# Altium PCB Routed BOARD 2.pcbdoc (part 1 of 2)
Units mil, origin at the board's own origin, x right, y up, seen from the top; angles counter-clockwise.
Board outline 6425 x 5035 mil, 2 copper layers (TopLayer, BottomLayer); 106 components, 189 nets, 1082 pads, 226 vias.
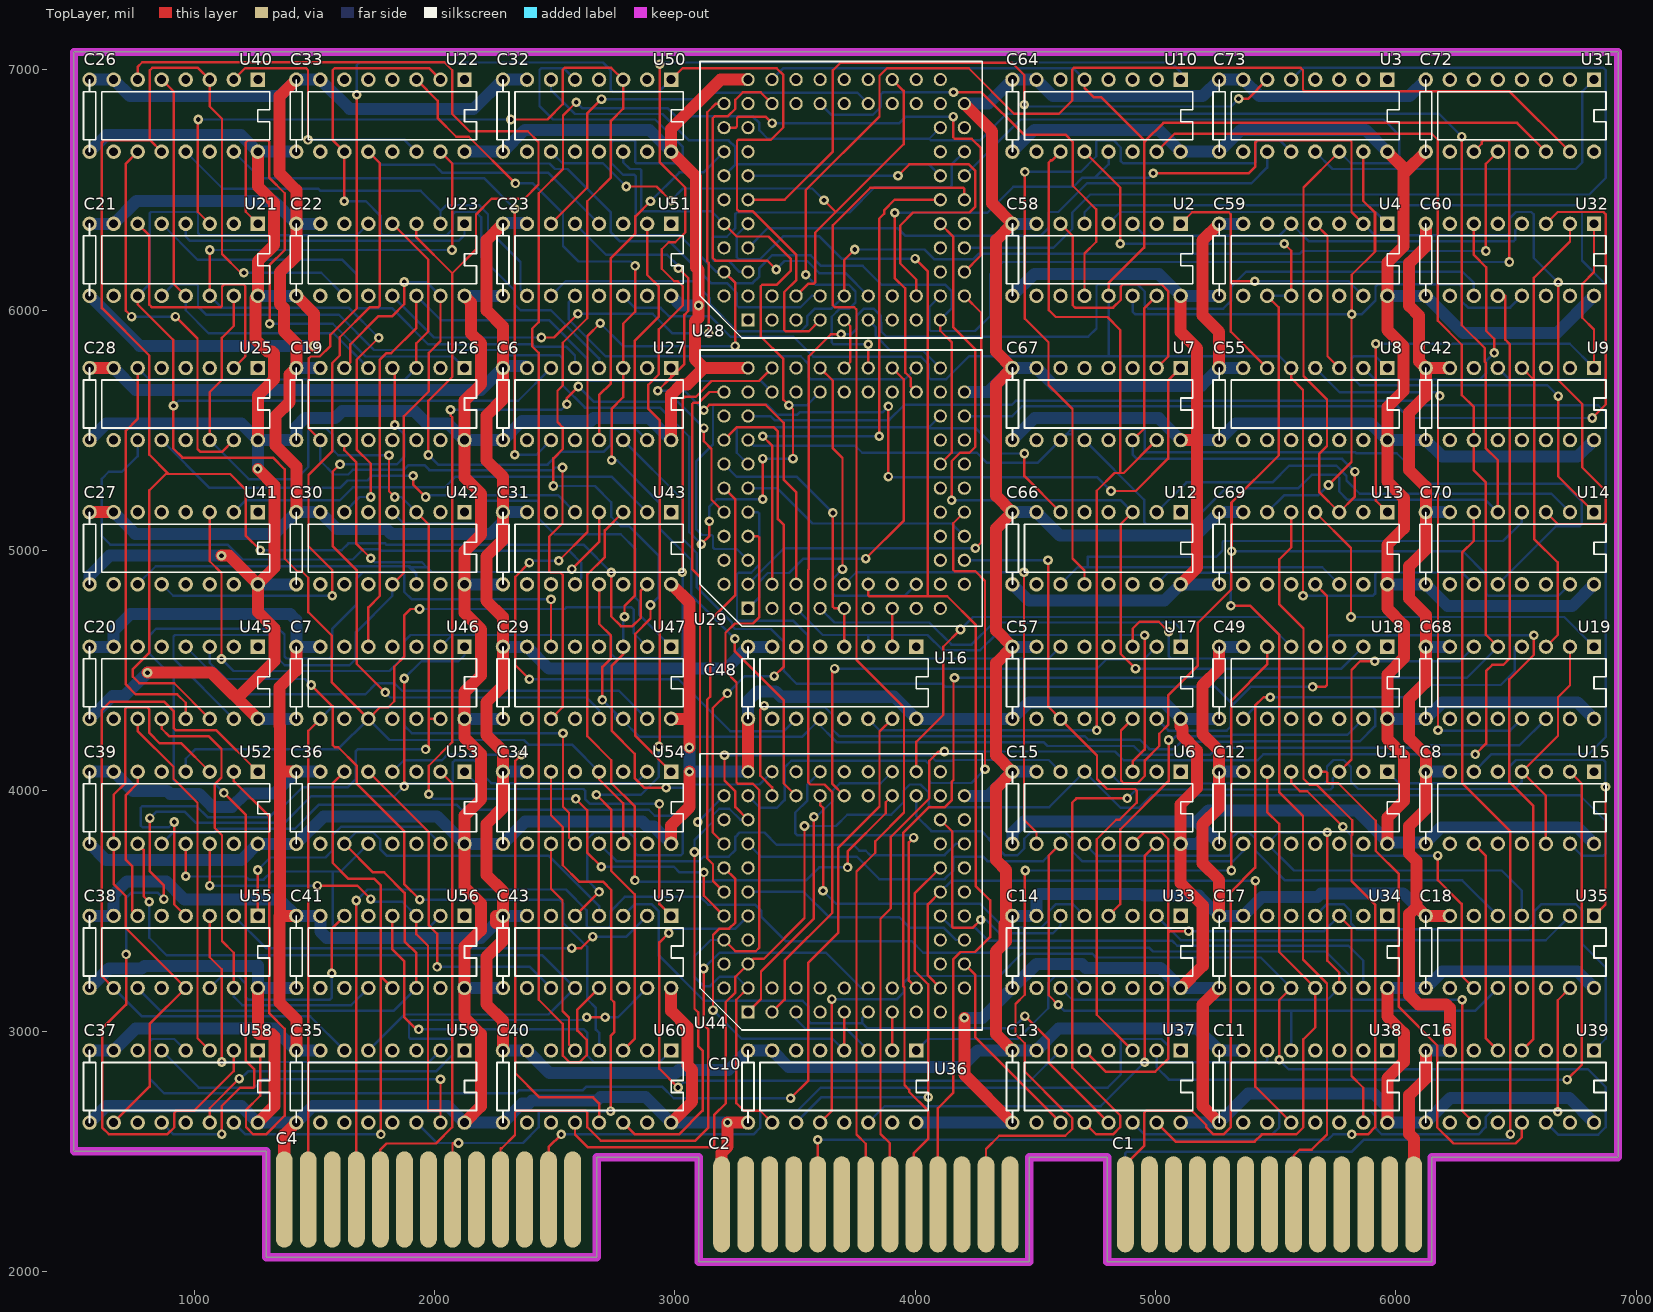
[diagram p0: TopLayer view]
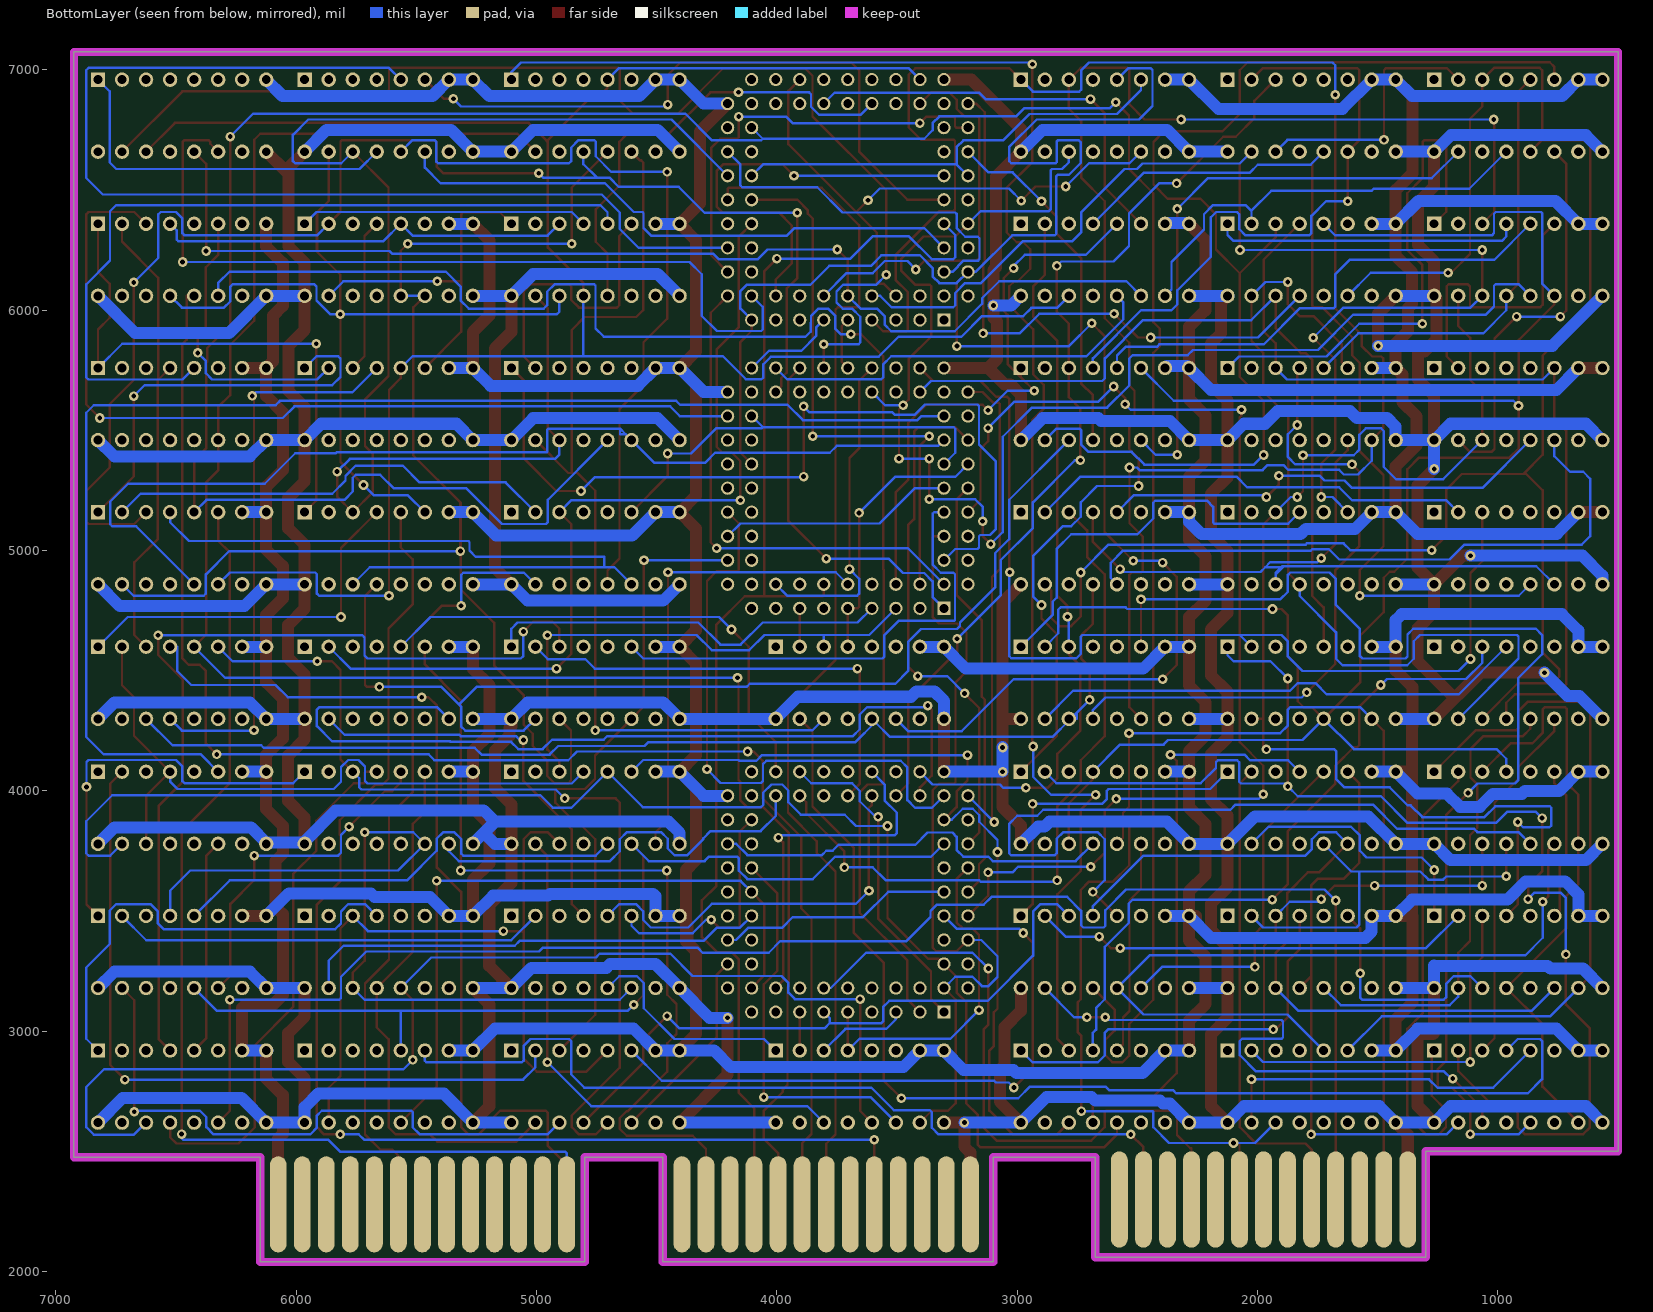
[diagram p1: BottomLayer view, seen from below]

## Layer stack, top to bottom
TopLayer: signal copper 1.4
Dielectric: core 12.6, FR-4, Dk 4.8
BottomLayer: signal copper 1.4

## Board outline
500,2500 500,7075 6925,7075 6925,2475 6150,2475 6150,2040 4800,2040 4800,2475 4475,2475 4475,2040 3100,2040 3100,2475 2675,2475 2675,2060 1300,2060 1300,2500 500,2500

## Design rules (kind name [scope] priority, off if disabled: settings)
Clearance [All] p1: gap=13
FabricationTestPointUsage TestPointUsage [All] p1: valid=0 allowmultiple=FALSE
FabricationTestpoint Testpoint [All] p1: side=3 testpointundercomponent=TRUE minsize=40 maxsize=100 preferedsize=60 minholesize=20 maxholesize=40 preferedholesize=32 testpointgrid=1 allowsidetop=TRUE allowsidebottom=TRUE usegrid=TRUE gridtolerance=0.01
FanoutControl Fanout_BGA [IsBGA] p1: bgadir=Out bgaviamode=Closest fanoutstyle=Auto fanoutdirection=Alternating viagrid=1 // Fanout_BGA (Default Rule)
FanoutControl Fanout_LCC [IsLCC] p2: bgadir=Out bgaviamode=Closest fanoutstyle=Auto fanoutdirection=Alternating viagrid=1 // Fanout_LCC (Default Rule)
FanoutControl Fanout_SOIC [IsSOIC] p3: bgadir=Out bgaviamode=Closest fanoutstyle=Auto fanoutdirection=Alternating viagrid=1 // Fanout_SOIC (Default Rule)
FanoutControl Fanout_Small [(CompPinCount < 5)] p4: bgadir=Out bgaviamode=Closest fanoutstyle=Auto fanoutdirection=OutThenIn viagrid=1 // Fanout_Small (Default Rule)
FanoutControl Fanout_Default [All] p5: bgadir=Out bgaviamode=Closest fanoutstyle=Auto fanoutdirection=Alternating viagrid=1 // Fanout_Default (Default Rule)
PlaneClearance [All] p1: clearance=10
PolygonConnect [All] p1: connectstyle=Relief reliefconductorwidth=10 reliefentries=4 polygonreliefangle="90 Angle"
RoutingPriority RoutingPriority_Power [InNetClass('Power')] p1: routingpriority=50
RoutingPriority [All] p2: routingpriority=0
RoutingVias [All] p1: holewidth=20 width=40 viastyle="Through Hole" minholewidth=20 minwidth=40 maxholewidth=20 maxwidth=40
SilkscreenOverComponentPads [All] p1: minsilkscreentomaskgap=10
SolderMaskExpansion [All] p1: expansion=2
Width Width_Power [InNetClass('Power')] p1: maxlimit=50 minlimit=50 preferedwidth=50
Width Width_All [All] p2: maxlimit=10 minlimit=10 preferedwidth=10
18 further rules are at their usual default settings.

## Classes and differential pairs
net class Power: GND VCC

## Components (designator, comment, footprint, x,y, rotation, side; value= is the part's Value field where it differs from the comment)
C1 "CON\26P\ED" CON\26P\ED 4875,2280 r180 top
C2 "CON\26P\ED" CON\26P\ED 3195,2280 r180 top
C4 "CON\26P\ED" CON\26P\ED 1375,2300 r180 top
C6 "CAP1" CAP1 2285,5460 r0 top
C7 "CAP1" CAP1 1425,4300 r0 top
C8 "CAP1" CAP1 6125,3780 r0 top
C10 "CAP1" CAP1 3305,2620 r0 top
C11 "CAP1" CAP1 5265,2620 r0 top
C12 "CAP1" CAP1 5265,3780 r0 top
C13 "CAP1" CAP1 4405,2620 r0 top
C14 "CAP1" CAP1 4405,3180 r0 top
C15 "CAP1" CAP1 4405,3780 r0 top
C16 "CAP1" CAP1 6125,2620 r0 top
C17 "CAP1" CAP1 5265,3180 r0 top
C18 "CAP1" CAP1 6125,3180 r0 top
C19 "CAP1" CAP1 1425,5460 r0 top
C20 "CAP1" CAP1 565,4300 r0 top
C21 "CAP1" CAP1 565,6060 r0 top
C22 "CAP1" CAP1 1425,6060 r0 top
C23 "CAP1" CAP1 2285,6060 r0 top
C26 "CAP1" CAP1 565,6660 r0 top
C27 "CAP1" CAP1 565,4860 r0 top
C28 "CAP1" CAP1 565,5460 r0 top
C29 "CAP1" CAP1 2285,4300 r0 top
C30 "CAP1" CAP1 1425,4860 r0 top
C31 "CAP1" CAP1 2285,4860 r0 top
C32 "CAP1" CAP1 2285,6660 r0 top
C33 "CAP1" CAP1 1425,6660 r0 top
C34 "CAP1" CAP1 2285,3780 r0 top
C35 "CAP1" CAP1 1425,2620 r0 top
C36 "CAP1" CAP1 1425,3780 r0 top
C37 "CAP1" CAP1 565,2620 r0 top
C38 "CAP1" CAP1 565,3180 r0 top
C39 "CAP1" CAP1 565,3780 r0 top
C40 "CAP1" CAP1 2285,2620 r0 top
C41 "CAP1" CAP1 1425,3180 r0 top
C42 "CAP1" CAP1 6125,5460 r0 top
C43 "CAP1" CAP1 2285,3180 r0 top
C48 "CAP1" CAP1 3305,4300 r0 top
C49 "CAP1" CAP1 5265,4300 r0 top
C55 "CAP1" CAP1 5265,5460 r0 top
C57 "CAP1" CAP1 4405,4300 r0 top
C58 "CAP1" CAP1 4405,6060 r0 top
C59 "CAP1" CAP1 5265,6060 r0 top
C60 "CAP1" CAP1 6125,6060 r0 top
C64 "CAP1" CAP1 4405,6660 r0 top
C66 "CAP1" CAP1 4405,4860 r0 top
C67 "CAP1" CAP1 4405,5460 r0 top
C68 "CAP1" CAP1 6125,4300 r0 top
C69 "CAP1" CAP1 5265,4860 r0 top
C70 "CAP1" CAP1 6125,4860 r0 top
C72 "CAP1" CAP1 6125,6660 r0 top
C73 "CAP1" CAP1 5265,6660 r0 top
U2 "7404" DIP14 5105,6360 r0 top
U3 "7404" DIP14 5965,6960 r0 top
U4 "7404" DIP14 5965,6360 r0 top
U6 "7404" DIP14 5105,4080 r0 top
U7 "7404" DIP14 5105,5760 r0 top
U8 "7404" DIP14 5965,5760 r0 top
U9 "7404" DIP14 6825,5760 r0 top
U10 "7404" DIP14 5105,6960 r0 top
U11 "7404" DIP14 5965,4080 r0 top
U12 "7404" DIP14 5105,5160 r0 top
U13 "7404" DIP14 5965,5160 r0 top
U14 "7404" DIP14 6825,5160 r0 top
U15 "7404" DIP14 6825,4080 r0 top
U16 "7404" DIP14 4005,4600 r0 top
U17 "7404" DIP14 5105,4600 r0 top
U18 "7404" DIP14 5965,4600 r0 top
U19 "7404" DIP14 6825,4600 r0 top
U21 "7404" DIP14 1265,6360 r0 top
U22 "7404" DIP14 2125,6960 r0 top
U23 "7404" DIP14 2125,6360 r0 top
U25 "7404" DIP14 1265,5760 r0 top
U26 "7404" DIP14 2125,5760 r0 top
U27 "7404" DIP14 2985,5760 r0 top
U28 "8397" ? 3305,5960 r0 top
U29 "8397" ? 3305,4760 r0 top
U31 "7404" DIP14 6825,6960 r0 top
U32 "7404" DIP14 6825,6360 r0 top
U33 "7404" DIP14 5105,3480 r0 top
U34 "7404" DIP14 5965,3480 r0 top
U35 "7404" DIP14 6825,3480 r0 top
U36 "7404" DIP14 4005,2920 r0 top
U37 "7404" DIP14 5105,2920 r0 top
U38 "7404" DIP14 5965,2920 r0 top
U39 "7404" DIP14 6825,2920 r0 top
U40 "7404" DIP14 1265,6960 r0 top
U41 "7404" DIP14 1265,5160 r0 top
U42 "7404" DIP14 2125,5160 r0 top
U43 "7404" DIP14 2985,5160 r0 top
U44 "8397" ? 3305,3080 r0 top
U45 "7404" DIP14 1265,4600 r0 top
U46 "7404" DIP14 2125,4600 r0 top
U47 "7404" DIP14 2985,4600 r0 top
U50 "7404" DIP14 2985,6960 r0 top
U51 "7404" DIP14 2985,6360 r0 top
U52 "7404" DIP14 1265,4080 r0 top
U53 "7404" DIP14 2125,4080 r0 top
U54 "7404" DIP14 2985,4080 r0 top
U55 "7404" DIP14 1265,3480 r0 top
U56 "7404" DIP14 2125,3480 r0 top
U57 "7404" DIP14 2985,3480 r0 top
U58 "7404" DIP14 1265,2920 r0 top
U59 "7404" DIP14 2125,2920 r0 top
U60 "7404" DIP14 2985,2920 r0 top

## Footprints (in the part's own frame and the unit in brackets; to place one, negate y for a bottom-side part, rotate by r counter-clockwise, add the part's x,y. Pads: shape width x height; smd on the part's side, far side on the other; paste and mask are expansions set on the pad)
CAP1 [mil]
  round 60 hole 37: 1(0,0) 2(0,300)
  silkscreen extent -25,0 25,300
CON\26P\ED [mil]
  oval 70x400 smd: 1(0,0) 3(-100,0) 5(-200,0) 7(-300,0) 9(-400,0) 11(-500,0) 13(-600,0) 15(-700,0) 17(-800,0) 19(-900,0) 21(-1000,0) 23(-1100,0) 25(-1200,0)
  oval 70x400 smd far side: 2(0,0) 4(-100,0) 6(-200,0) 8(-300,0) 10(-400,0) 12(-500,0) 14(-600,0) 16(-700,0) 18(-800,0) 20(-900,0) 22(-1000,0) 24(-1100,0) 26(-1200,0)
DIP14 [mil]
  rect 60x60 hole 37: 1(0,0)
  round 60 hole 37: 2(-100,0) 3(-200,0) 4(-300,0) 5(-400,0) 6(-500,0) 7(-600,0) 8(-600,-300) 9(-500,-300) 10(-400,-300) 11(-300,-300) 12(-200,-300) 13(-100,-300) 14(0,-300)
  silkscreen extent -650,-250 50,-50
? [mil]
  rect 55x55 hole 37: 1(0,0)
  round 55 hole 37: 2(0,100) 3(100,0) 4(100,100) 5(200,0) 6(200,100) 7(300,0) 8(300,100) 9(400,0) 10(400,100) 11(500,0) 12(500,100) 13(600,0) 14(600,100) 15(700,0) 16(700,100) 17(800,0) 18(900,100) 19(800,100) 20(900,200) 21(800,200) 22(900,300) 23(800,300) 24(900,400) 25(800,400) 26(900,500) 27(800,500) 28(900,600) 29(800,600) 30(900,700) 31(800,700) 32(900,800) 33(800,800) 34(900,900) 35(800,1000) 36(800,900) 37(700,1000) 38(700,900) 39(600,1000) 40(600,900) 41(500,1000) 42(500,900) 43(400,1000) 44(400,900) 45(300,1000) 46(300,900) 47(200,1000) 48(200,900) 49(100,1000) 50(100,900) 51(0,1000) 52(-100,900) 53(0,900) 54(-100,800) 55(0,800) 56(-100,700) 57(0,700) 58(-100,600) 59(0,600) 60(-100,500) 61(0,500) 62(-100,400) 63(0,400) 64(-100,300) 65(0,300) 66(-100,200) 67(0,200) 68(-100,100)
  silkscreen extent -200,-75 975,1075

## Via types
v1: diameter 40, hole 20, TopLayer to BottomLayer, 226 vias

## Nets (pads, with @x,y where several pads share a name; then routed paths per layer and width w, separated by ;. In a path a pad name is that pad's centre, name@x,y a point inside that pad or via, vN(x,y) a via of type N, cw(c..) or ccw(c..) an arc to the next point about the centre after c; other vN are vias at no path point)
$$$8: U23.11 U28.52 | length 2471.4
  TopLayer w10: v1(2445,5887) 2498,5887 v1(2597,5986) ; v1(3142,5904) 3142,6197 3135,6204 3135,6824 3171,6860 U28.52@3205,6860
  BottomLayer w10: U23.11@1825,6060 1998,5887 v1(2445,5887) ; v1(2597,5986) 2908,5986 2990,5904 v1(3142,5904)
$$$63: U55.12 U56.6 | length 966.1
  TopLayer w10: v1(1573,3241) 1573,3428 U56.6@1625,3480
  BottomLayer w10: U55.12@1065,3180 1114,3229 1184,3229 1214,3199 1214,3143 1225,3132 1565,3132 1573,3140 v1(1573,3241)
$$$144: U22.3 U27.3 U44.48 | length 3929.5
  TopLayer w10: U22.3@1925,6960 2013,6872 2013,6800 2091,6722 2143,6722 v1(2337,6528) ; v1(2737,5376) 2737,5590 2785,5638 U27.3@2785,5760 2785,5944 2835,5994 v1(2835,6185) ; v1(3250,4633) 3250,4581 3453,4378 3453,4032 U44.48@3505,3980
  BottomLayer w10: v1(2337,6528) 2410,6528 2535,6403 2535,6268 2600,6203 2817,6203 v1(2835,6185) ; v1(2737,5376) 2760,5376 2935,5201 2935,5094 3069,4960 3069,4814 v1(3250,4633)
$$$183: U4.4 U8.3 | length 641.4
  TopLayer w10: U4.4@5665,6360 5716,6309 5716,5809 U8.3@5765,5760
$$$210: U3.5 U28.22 | length 4610.8
  BottomLayer w10: U28.22@4205,6260 4575,6260 4654,6339 4654,6407 4729,6482 6805,6482 6874,6551 6874,6999 6864,7009 5614,7009 U3.5@5565,6960
$$$274: U28.30 U28.67 | length 1539
  BottomLayer w10: U28.67@3305,6160 3270,6160 3223,6207 3163,6207 3157,6213 3157,6299 3164,6306 3216,6306 3252,6342 3252,6401 3258,6407 3727,6407 3832,6512 4144,6512 4152,6520 4152,6607 U28.30@4205,6660
$$$675: C2.15 U32.10 | length 6290.9
  TopLayer w10: C2.15@3895,2280 3895,2534 3856,2573 3856,3468 3899,3511 3899,3809 4059,3969 4059,4125 4098,4164 v1(4122,4164) ; v1(6331,4152) 6376,4197 6376,4499 6402,4525 6448,4525 6474,4551 6474,5860 6456,5878 6456,6060 U32.10@6425,6060
  BottomLayer w10: v1(4122,4164) 4832,4164 4868,4128 5425,4128 5449,4152 v1(6331,4152)
$$$691: U26.8 U28.7 U47.9 U50.1 | length 7445
  TopLayer w10: U26.8@1525,5460 1477,5508 1477,5800 1485,5808 1523,5808 1567,5852 1567,5898 1677,6008 v1(1677,6897) ; U47.9@2485,4300 2534,4349 2534,4899 2524,4909 2484,4909 2478,4915 2478,5059 2533,5114 v1(2533,5346) ; U50.1@2985,6960 3032,7007 3424,7007 3452,6979 3452,6762 3400,6710 3264,6710 3259,6705 3259,6420 3266,6413 3323,6413 3506,6230 3506,6126 3455,6075 3455,5919 3461,5913 3558,5913 U28.7@3605,5960
  BottomLayer w10: U26.8@1525,5460 1525,5374 1582,5317 1641,5317 1660,5336 1872,5336 1892,5356 1958,5356 1979,5335 2491,5335 2502,5346 v1(2533,5346) ; v1(1677,6897) 1677,7020 1688,7031 2702,7031 2733,7000 2733,6919 2742,6910 2935,6910 U50.1@2985,6960
$$$859: U44.30 U54.11 | length 1689.7
  BottomLayer w10: U54.11@2685,3780 2757,3708 3102,3708 3120,3726 3224,3726 3252,3754 3252,3809 3270,3827 3373,3827 3424,3776 3743,3776 3768,3751 3795,3751 3813,3733 4123,3733 4170,3780 U44.30@4205,3780
$$$1023: U28.11 U29.35 | length 403.3
  BottomLayer w10: U28.11@3805,5960 3837,5928 3837,5893 3898,5832 4033,5832 U29.35@4105,5760
$$$1061: U8.2 U32.6 | length 1212.9
  TopLayer w10: U32.6@6325,6360 6325,6230 6376,6179 6376,5915 6410,5881 v1(6410,5823)
  BottomLayer w10: U8.2@5865,5760 5913,5712 6350,5712 6376,5738 6376,5789 v1(6410,5823)
$$$1139: U2.5 U9.5 | length 3345
  BottomLayer w10: U2.5@4705,6360 4705,6408 4734,6437 6750,6437 6775,6412 6775,6207 6874,6108 6874,5721 6865,5712 6473,5712 U9.5@6425,5760
$$$1166: U52.1 U55.8 U59.6 | length 3069.9
  TopLayer w10: U55.8@665,3180 616,3229 616,4337 651,4372 874,4372 916,4330 916,4261 925,4252 1093,4252 U52.1@1265,4080
  BottomLayer w10: U55.8@665,3180 783,3062 1483,3062 U59.6@1625,2920
$$$1338: U28.20 U28.54 | length 1779.1
  TopLayer w10: U28.54@3205,6760 3254,6760 3259,6765 3259,6800 3265,6806 3378,6806 v1(3405,6779) ; v1(4159,6806) 4159,6720 4165,6714 4235,6714 4274,6675 4274,6229 U28.20@4205,6160
  BottomLayer w10: v1(3405,6779) 3935,6779 3962,6806 v1(4159,6806)
$$$1745: U38.10 U44.19 U44.27 | length 2840.8
  TopLayer w10: U44.19@4105,3180 4053,3232 4053,3528 U44.27@4105,3580 ; v1(5416,3626) 5416,2769 U38.10@5565,2620
  BottomLayer w10: U44.27@4105,3580 4151,3626 v1(5416,3626)
$$$1779: U12.2 U14.2 | length 1891
  BottomLayer w10: U12.2@5005,5160 5129,5284 5487,5284 5556,5353 5753,5353 5795,5311 5795,5292 5850,5237 6648,5237 U14.2@6725,5160
$$$1934: U28.19 U31.9 | length 3470.6
  TopLayer w10: U31.9@6325,6660 6358,6693 6358,6701 6365,6708 6465,6708 6473,6700 v1(6473,6201)
  BottomLayer w10: U28.19@4105,6060 4059,6014 4059,5920 4065,5914 4250,5914 4313,5977 4313,6150 4364,6201 v1(6473,6201)
$$$1952: U53.13 U55.1 | length 1091.9
  TopLayer w10: U55.1@1265,3480 v1(1265,3671)
  BottomLayer w10: v1(1265,3671) 1317,3723 1546,3723 1574,3751 1574,3814 1611,3851 1954,3851 U53.13@2025,3780
$$$2193: U28.9 U29.43 | length 221.5
  TopLayer w10: U29.43@3705,5760 3731,5786 3731,5934 U28.9@3705,5960
$$$2370: U52.2 U58.1 | length 2072.1
  TopLayer w10: U52.2@1165,4080 1165,4041 1313,3893 1313,3074 1377,3010 1377,2649 1299,2571 1246,2571 1216,2601 1216,2673 1275,2732 1275,2910 U58.1@1265,2920
$$$2381: U3.9 U28.65 | length 2426.3
  BottomLayer w10: U28.65@3305,6260 3387,6342 3927,6342 3958,6311 4524,6311 4555,6342 4555,6404 4560,6409 4596,6409 4716,6529 5400,6529 5465,6594 U3.9@5465,6660
$$$2413: U28.16 U28.59 | length 1791.1
  TopLayer w10: v1(3929,6560) 3976,6607 4224,6607 4251,6580 4251,6432 4226,6407 3992,6407 3938,6353 3938,6195 4005,6128 U28.16@4005,6060
  BottomLayer w10: U28.59@3305,6560 v1(3929,6560)
$$$2423: U29.41 U31.13 | length 5032.3
  TopLayer w10: v1(3545,6148) 3545,6500 3852,6807 3852,6976 3883,7007 4223,7007 4412,6818 4599,6818 4654,6873 4654,7002 4661,7009 5604,7009 5614,6999 5614,6918 5621,6911 6474,6911 U31.13@6725,6660 ; U29.41@3805,5760 v1(3805,5859)
  BottomLayer w10: v1(3545,6148) 3586,6107 3724,6107 3752,6079 3752,6033 3726,6007 3687,6007 3653,5973 3653,5866 3660,5859 v1(3805,5859)
$$$2613: C1.15 U12.13 | length 3251
  TopLayer w10: v1(5314,4771) 5394,4771 5516,4649 5516,3994 5614,3896 5614,3299 5714,3199 5714,2571 5650,2507 5600,2507 5575,2482 C1.15@5575,2280
  BottomLayer w10: U12.13@5005,4860 5053,4908 5305,4908 5314,4899 v1(5314,4771)
$$$2920: U11.8 U44.38 | length 1704.7
  BottomLayer w10: U44.38@4005,3980 4005,3896 4068,3833 4276,3833 4306,3803 4306,3800 4374,3732 4425,3732 4454,3761 4454,3801 4482,3829 4624,3829 4654,3799 4654,3749 4695,3708 5324,3708 5365,3749 U11.8@5365,3780
$$$3035: U4.9 U4.10 U10.10 U14.13 U17.12 | length 6467.2
  TopLayer w10: U10.10@4705,6660 4854,6511 v1(4854,6277) ; U17.12@4905,4300 4857,4252 4857,4043 4868,4032 4925,4032 4956,4063 4956,4127 5016,4187 5016,4238 5054,4276 5054,4399 5177,4522 5177,4700 5316,4839 5316,4998 5316,5199 5317,5200 ; v1(5317,4998) 5317,5200 ; U4.9@5465,6060 5513,6012 ; v1(5536,6277) 5565,6248 U4.10@5565,6060 ; 5317,5200 5513,5396 ; 5513,5396 5513,6012 ; 5513,5396 5514,5397 5514,6011 5513,6012
  BottomLayer w10: v1(4854,6277) v1(5536,6277) ; v1(5317,4998) 6279,4998 6376,4901 6376,4821 6385,4812 6677,4812 U14.13@6725,4860 ; U4.9@5465,6060 U4.10@5565,6060
$$$3036: C2.23 U18.6 | length 3666.8
  TopLayer w10: C2.23@4295,2280 4295,2510 4350,2565 4625,2565 4654,2594 4654,2639 4625,2668 4620,2668 4456,2832 4456,2950 4418,2988 4418,3114 4456,3152 4456,3667 v1(4458,3669) ; v1(5316,3669) 5316,4377 5465,4526 U18.6@5465,4600
  BottomLayer w10: v1(4458,3669) v1(5316,3669)
$$$3260: U21.3 U50.3 U54.1 | length 5841.6
  TopLayer w10: v1(1017,6794) 1015,6792 1015,6410 U21.3@1065,6360 ; v1(2318,6794) 2470,6794 2534,6858 2534,7002 2541,7009 2736,7009 U50.3@2785,6960 2785,6839 2734,6788 2734,6552 2636,6454 2636,5967 2534,5865 2534,5687 2512,5665 2512,5535 2534,5513 2534,5423 2495,5384 v1(2495,5269) ; v1(2899,4774) 2899,4717 2836,4654 2836,4229 U54.1@2985,4080
  BottomLayer w10: v1(1017,6794) v1(2318,6794) ; v1(2495,5269) 2668,5269 2736,5201 2736,5141 2775,5102 2810,5102 2934,4978 2934,4809 v1(2899,4774)
$$$3322: U28.6 U28.39 U50.9 | length 2449.3
  TopLayer w10: v1(2798,6515) 2924,6515 v1(2983,6456) ; U28.6@3505,6060 3555,6110 3578,6110 3584,6116 3584,6323 3670,6409 ; v1(3621,6458) 3670,6409 ; U28.39@3905,6960 3952,6913 3952,6691 3670,6409
  BottomLayer w10: U50.9@2485,6660 2533,6612 2701,6612 v1(2798,6515) ; v1(2983,6456) 3034,6507 3572,6507 v1(3621,6458)
$$$3431: C2.19 U28.63 U29.12 | length 5514.4
  TopLayer w10: U29.12@3805,4860 3805,4815 3810,4810 4052,4810 ; v1(4000,6215) 4052,6163 4052,4810 ; C2.19@4095,2280 4095,2680 4158,2743 4158,3299 4189,3330 4250,3330 4312,3392 4312,3545 4252,3605 4252,4692 4134,4810 4052,4810
  BottomLayer w10: U28.63@3305,6360 3258,6313 3258,6221 3266,6213 3356,6213 3452,6309 3600,6309 3694,6215 v1(4000,6215)
$$$3444: U44.49 U47.3 U51.2 | length 3064.4
  TopLayer w10: U47.3@2785,4600 2785,4568 2737,4520 2737,4251 2833,4155 2833,4054 2874,4013 v1(2964,4013) ; v1(2791,4725) 2791,4770 2834,4813 2834,5874 2934,5974 2934,6099 2885,6148 U51.2@2885,6360
  BottomLayer w10: U47.3@2785,4600 2785,4719 v1(2791,4725) ; v1(2964,4013) 3058,4013 3072,4027 3352,4027 U44.49@3405,4080
$$$3502: U18.5 U44.37 | length 2117.1
  TopLayer w10: U44.37@4005,4080 4005,4204 4117,4316 4117,4600 v1(4189,4672)
  BottomLayer w10: v1(4189,4672) 4241,4724 5441,4724 U18.5@5565,4600
$$$3567: U52.6 U55.6 | length 640.6
  TopLayer w10: U55.6@765,3480 743,3502 743,3686 716,3713 716,3983 765,4032 U52.6@765,4080
$$$3685: U17.9 U29.20 U37.3 | length 2748.1
  TopLayer w10: v1(4553,4960) 4554,4959 4554,4351 U17.9@4605,4300 4757,4148 4757,4050 4799,4008 4916,4008 4922,4002 4922,3951 4851,3880 4837,3880 4756,3799 4756,3069 U37.3@4905,2920
  BottomLayer w10: U29.20@4205,4960 v1(4553,4960)
$$$3867: U29.32 U32.3 | length 3793.1
  TopLayer w10: U32.3@6625,6360 6674,6409 6864,6409 6874,6399 6874,5608 v1(6818,5552)
  BottomLayer w10: U29.32@4205,5560 4404,5560 4444,5600 6008,5600 6056,5552 v1(6818,5552)
$$$3914: C2.13 U28.26 | length 5000.9
  TopLayer w10: C2.13@3795,2280 3795,2532 3756,2571 3756,3665 3834,3743 3834,3790 3954,3910 3954,4347 3756,4545 3756,6004 3747,6013 3666,6013 3658,6021 3658,6354 3814,6510 4200,6510 4205,6505 U28.26@4205,6460
$$$3928: U28.29 U28.58 U50.6 | length 1919.5
  BottomLayer w10: U50.6@2485,6960 2485,6917 2585,6817 2949,6817 3059,6707 3224,6707 3252,6679 3252,6607 ; U28.58@3205,6560 3252,6607 ; U28.29@4105,6560 4058,6607 3252,6607
$$$3971: U28.42 U51.6 | length 1746.2
  TopLayer w10: U51.6@2485,6360 2635,6510 2635,6819 v1(2695,6879)
  BottomLayer w10: v1(2695,6879) 3132,6879 3159,6906 3759,6906 U28.42@3805,6860
$$$4009: U16.2 U29.13 | length 160
  TopLayer w10: U16.2@3905,4600 U29.13@3905,4760
$$$4093: U3.6 U28.61 | length 2787.9
  TopLayer w10: U28.61@3305,6460 3457,6460 3658,6661 3658,6999 3689,7030 4403,7030 4454,6979 v1(4454,6856) ; v1(5346,6880) 5385,6880 U3.6@5465,6960
  BottomLayer w10: v1(4454,6856) 4462,6848 5314,6848 v1(5346,6880)
$$$4176: U6.4 U15.4 U15.12 U19.2 | length 2900.6
  TopLayer w10: U15.12@6625,3780 6625,3980 U15.4@6525,4080 6675,4230 6675,4390 6725,4440 U19.2@6725,4600
  BottomLayer w10: U6.4@4805,4080 4854,4031 5704,4031 5714,4041 5714,4102 5741,4129 5784,4129 5814,4099 5814,4038 5844,4008 6494,4008 6525,4039 U15.4@6525,4080
$$$4277: U12.9 U13.12 U14.4 | length 3190
  BottomLayer w10: U12.9@4605,4860 4676,4931 4719,4931 ; U13.12@5765,4860 5694,4931 4719,4931 ; U14.4@6525,5160 6525,5118 6447,5040 5284,5040 5279,5035 5279,5000 5253,4974 4719,4974 4719,4931
$$$4295: U6.3 U16.3 U29.5 | length 2186.3
  TopLayer w10: U6.3@4905,4080 4905,4122 4955,4172 v1(4955,4648)
  BottomLayer w10: U29.5@3505,4760 3616,4649 3805,4649 ; U16.3@3805,4600 3805,4649 ; v1(4955,4648) 4954,4649 4334,4649 4271,4586 4115,4586 4052,4649 3805,4649
$$$4393: U28.10 U31.10 U51.9 | length 4727.9
  TopLayer w10: U28.10@3705,6060 3705,6209 v1(3749,6253) ; v1(6375,6247) 6375,6610 U31.10@6425,6660
  BottomLayer w10: U51.9@2485,6060 2546,6121 3075,6121 3146,6050 3146,6027 3260,5913 3524,5913 3552,5941 3552,5976 3583,6007 3652,6007 U28.10@3705,6060 ; v1(3749,6253) 4039,6253 4079,6213 4243,6213 4266,6236 5601,6236 5612,6247 v1(6375,6247)
$$$4428: U28.27 U29.4 | length 2317.7
  TopLayer w10: v1(3366,5476) 3405,5437 U29.4@3405,4860 ; v1(3851,5476) 3851,6382 3871,6402 3871,6416 3915,6460 U28.27@4105,6460
  BottomLayer w10: v1(3366,5476) v1(3851,5476)
$$$4500: U7.9 U14.10 U29.57 | length 4341.4
  BottomLayer w10: U29.57@3305,5460 3329,5436 3751,5436 3780,5407 4257,5407 4299,5365 4510,5365 U7.9@4605,5460 4629,5484 ; U14.10@6425,4860 6666,5101 6765,5101 6774,5110 6774,5204 6700,5278 6131,5278 6004,5405 5835,5405 5831,5409 4958,5409 4956,5411 4956,5502 4950,5508 4653,5508 ; 4629,5484 4653,5508 ; 4629,5484 4653,5484 4653,5508
$$$4620: U6.6 U44.55 U60.12 | length 3582.8
  TopLayer w10: U60.12@2785,2620 2834,2571 3017,2571 3116,2670 3116,2920 3097,2939 3097,3079 3082,3094 v1(3082,3746) ; v1(3207,4149) 3207,4043 3252,3998 3252,3933 U44.55@3305,3880
  BottomLayer w10: v1(3082,3746) 3082,3796 3158,3872 3158,3899 3185,3926 3227,3926 3273,3880 U44.55@3305,3880 ; v1(3207,4149) 4062,4149 4085,4126 4157,4126 4160,4129 4556,4129 U6.6@4605,4080
$$$4672: C1.1 U19.4 | length 3901.8
  TopLayer w10: C1.1@4875,2280 4875,2445 4954,2524 4954,2662 4961,2669 5152,2669 5212,2609 5212,2600 5241,2571 5284,2571 5314,2601 5314,3580 5415,3681 5415,4355 5450,4390 v1(5478,4390)
  BottomLayer w10: v1(5478,4390) 6035,4390 6086,4441 6437,4441 6496,4500 6496,4600 U19.4@6525,4600
$$$4682: U29.37 U51.10 | length 1709.8
  BottomLayer w10: U51.10@2585,6060 2558,6033 2558,5963 2712,5809 3524,5809 3558,5775 3558,5721 3566,5713 3958,5713 U29.37@4005,5760
$$$4769: C4.9 U53.2 | length 2044.8
  TopLayer w10: C4.9@1775,2300 1775,2508 1800,2533 2006,2533 2074,2601 2074,4031 U53.2@2025,4080
$$$4820: U8.1 U14.1 | length 1687.3
  TopLayer w10: v1(6676,5643) 6676,5309 U14.1@6825,5160
  BottomLayer w10: U8.1@5965,5760 5916,5809 5826,5809 5816,5799 5816,5723 5851,5688 6631,5688 v1(6676,5643)
$$$4897: U4.2 U10.11 U14.3 U29.38 | length 5848.6
  TopLayer w10: v1(3915,6406) 3915,6135 3959,6091 3959,5741 3982,5718 3982,5683 U29.38@4005,5660 ; v1(4991,6570) 5387,6570 5416,6599 5416,6699 5425,6708 5810,6708 5816,6702 5816,6409 U4.2@5865,6360 ; U14.3@6625,5160 6674,5111 6864,5111 6874,5121 6874,5248 6776,5346 6776,5610 6676,5710 v1(6676,6116)
  BottomLayer w10: v1(3915,6406) 4301,6406 4409,6514 4659,6514 4697,6552 4749,6552 ; U10.11@4805,6660 4805,6608 4749,6552 ; v1(4991,6570) 4973,6552 4749,6552 ; U4.2@5865,6360 5913,6312 6465,6312 6474,6321 6474,6382 6501,6409 6564,6409 6574,6399 6574,6218 v1(6676,6116)
$$$4960: U13.4 U19.1 | length 1560.1
  TopLayer w10: U13.4@5665,5160 5814,5011 v1(5814,4724)
  BottomLayer w10: v1(5814,4724) 6701,4724 U19.1@6825,4600
$$$4961: U29.1 U29.39 | length 1491.3
  TopLayer w10: v1(3795,4967) 3952,5124 3952,5713 U29.39@3905,5760
  BottomLayer w10: U29.1@3305,4760 3352,4807 3352,4872 3387,4907 3476,4907 3536,4967 v1(3795,4967)
$$$5040: U15.6 U29.55 | length 5587.5
  BottomLayer w10: U29.55@3305,5560 3398,5560 3415,5543 3892,5543 3956,5607 4403,5607 4419,5623 6068,5623 6086,5605 6843,5605 6874,5574 6874,4225 6801,4152 6397,4152 U15.6@6325,4080
$$$5164: U32.9 U44.3 | length 6315.6
  TopLayer w10: U44.3@3405,3080 3457,3132 3457,3294 3656,3493 3656,3994 3623,4027 3564,4027 3556,4035 3556,4921 3558,4923 3558,5809 3649,5900 v1(3692,5900)
  BottomLayer w10: v1(3692,5900) 3734,5900 3758,5924 3758,5978 3787,6007 3827,6007 3858,5976 3858,5949 3860,5947 3860,5911 3881,5890 4720,5890 4755,5925 4755,6103 4760,6108 4925,6108 4956,6077 4956,6021 4970,6007 5282,6007 5316,6041 5316,6099 5378,6161 6277,6161 6325,6113 U32.9@6325,6060
$$$5310: U12.6 U29.33 U29.59 | length 1783.1
  TopLayer w10: v1(4455,5404) 4455,5310 U12.6@4605,5160
  BottomLayer w10: U29.59@3305,5360 3258,5407 3258,5507 3265,5514 4059,5514 ; U29.33@4105,5560 4059,5514 ; v1(4455,5404) 4357,5404 4251,5510 4063,5510 4059,5514
$$$5404: U9.4 U19.3 U32.2 | length 1953.6
  TopLayer w10: U9.4@6525,5760 6574,5711 ; U19.3@6625,4600 6674,4649 6674,4951 6576,5049 6576,5709 6574,5711 ; U32.2@6725,6360 6725,6286 6574,6135 6574,5711
$$$5494: U15.2 U37.2 | length 3125.7
  TopLayer w10: v1(6713,2799) 6774,2860 6774,4031 U15.2@6725,4080
  BottomLayer w10: U37.2@5005,2920 5005,2850 5056,2799 v1(6713,2799)
$$$5496: C1.2 U14.6 | length 4549.2
  TopLayer w10: U14.6@6325,5160 6325,5041 6276,4992 6276,4033 6477,3832 v1(6477,2572)
  BottomLayer w10: C1.2@4875,2280 4875,2493 4880,2498 5816,2498 5866,2548 6470,2548 6477,2555 v1(6477,2572)
$$$5591: U12.3 U18.2 U28.25 | length 3730.3
  TopLayer w10: U28.25@4105,6360 4158,6307 4158,5930 4251,5837 4251,5432 4226,5407 4187,5407 4152,5372 v1(4152,5210) ; U12.3@4905,5160 4856,5111 4856,4570 v1(4917,4509)
  BottomLayer w10: v1(4152,5210) 4855,5210 U12.3@4905,5160 ; v1(4917,4509) 5774,4509 U18.2@5865,4600
$$$5741: U7.1 U29.67 | length 3537.7
  TopLayer w10: v1(3889,5308) v1(3889,5600) ; v1(4815,5248) 4918,5248 5053,5383 5053,5708 U7.1@5105,5760
  BottomLayer w10: U29.67@3305,4960 3258,5007 3165,5007 3159,5013 3159,5060 3154,5065 3114,5065 3089,5090 3089,5371 3159,5441 3159,5602 3165,5608 3384,5608 3426,5566 3510,5566 3519,5575 3864,5575 v1(3889,5600) ; v1(3889,5308) 3891,5306 4757,5306 v1(4815,5248)
$$$5835: U37.11 U44.11 U57.3 | length 2713.2
  TopLayer w10: v1(4457,3063) 4557,2963 4557,2868 U37.11@4805,2620
  BottomLayer w10: U57.3@2785,3480 2833,3528 2905,3528 2934,3499 2934,3315 3122,3127 3532,3127 3558,3101 3558,3041 3565,3034 3780,3034 ; U44.11@3805,3080 3780,3055 3780,3034 ; v1(4457,3063) 4406,3012 3802,3012 3780,3034
$$$5943: C2.17 U9.9 U10.13 U19.5 | length 8125.2
  TopLayer w10: C2.17@3995,2280 3995,2493 4054,2552 4054,2670 3976,2748 3976,2756 3956,2776 3956,3182 3950,3188 3950,3825 4058,3933 4124,3933 4152,3961 4152,4038 4160,4046 4160,4467 v1(4164,4471) ; U10.13@5005,6660 5080,6735 6150,6735 6175,6710 6175,5957 6275,5857 6275,5647 6325,5597 U9.9@6325,5460 6325,5334 6375,5284 6375,4650 U19.5@6425,4600
  BottomLayer w10: v1(4164,4471) 6296,4471 U19.5@6425,4600
$$$5975: U29.16 U29.45 | length 1363.9
  TopLayer w10: U29.45@3605,5760 3658,5707 3658,5425 3698,5385 v1(3698,4923)
  BottomLayer w10: v1(3698,4923) 3658,4883 3658,4821 3666,4813 3958,4813 U29.16@4005,4860
$$$6004: U27.1 U29.6 U51.5 | length 2422.2
  TopLayer w10: v1(2929,5665) 2985,5721 ; U27.1@2985,5760 2985,5721 ; v1(3015,6175) 3056,6134 3056,5997 3040,5981 3040,5776 3004.5,5740.5 2985,5721 ; v1(3121,5584) 3144,5607 3378,5607 3453,5532 3453,5296 3505,5244 U29.6@3505,4860
  BottomLayer w10: U51.5@2585,6360 2714,6231 2968,6231 3015,6184 v1(3015,6175) ; v1(2929,5665) 3040,5665 v1(3121,5584)
$$$6007: U2.12 U3.13 U13.6 U32.11 | length 3989
  TopLayer w10: v1(5720,5273) 5816,5369 5816,5984 5816,6147 5817,6148 ; v1(5817,5984) 5817,6148 ; U3.13@5865,6660 5865,6455 5913,6407 ; 5817,6148 5913,6244 ; 5913,6244 5913,6407 ; 5913,6244 5914,6245 5914,6406 5913,6407
  BottomLayer w10: U2.12@4905,6060 4905,5994 4915,5984 v1(5817,5984) 5859,5984 5916,6041 5916,6099 5926,6109 6264,6109 6274,6099 6274,6038 6301,6011 6476,6011 U32.11@6525,6060 ; U13.6@5465,5160 5535,5230 5677,5230 v1(5720,5273)
$$$6327: U29.22 U29.61 | length 982.8
  BottomLayer w10: U29.61@3305,5260 3426,5260 3573,5113 4152,5113 U29.22@4205,5060
$$$6506: U23.12 U29.50 U46.5 | length 3248.9
  TopLayer w10: U46.5@1725,4600 1725,4764 1773,4812 1773,5795 1800,5822 1820,5822 1925,5927 U23.12@1925,6060
  BottomLayer w10: U23.12@1925,6060 2026,5959 2476,5959 2635,5800 2635,5717 2646,5706 3359,5706 U29.50@3405,5660
$$$6549: C4.3 U46.8 U54.10 | length 3616.1
  TopLayer w10: C4.3@1475,2300 1475,4250 U46.8@1525,4300 ; v1(2535,4240) 2535,3934 2560,3909 2560,3805 U54.10@2585,3780
  BottomLayer w10: U46.8@1525,4300 1574,4349 1864,4349 1874,4339 1874,4272 1906,4240 v1(2535,4240)
$$$6602: U16.4 U29.9 U29.58 | length 1137.6
  TopLayer w10: v1(3658,5157) 3658,4766 3664,4760 U29.9@3705,4760 U16.4@3705,4600
  BottomLayer w10: U29.58@3205,5360 3258,5307 3508,5307 v1(3658,5157)
$$$6889: U17.3 U39.4 | length 3795.8
  TopLayer w10: U17.3@4905,4600 4905,4675 4934,4704 5014,4704 v1(5055,4663) ; U39.4@6525,2920 6573,2968 6573,3937 6473,4037 6473,4465 6575,4567 v1(6575,4648)
  BottomLayer w10: v1(5055,4663) 5055,4562 5066,4551 5704,4551 5716,4563 5716,4639 5725,4648 v1(6575,4648)
$$$6926: U43.3 U44.40 | length 2963.1
  TopLayer w10: U43.3@2785,5160 2709,5084 2709,4974 2636,4901 2636,4228 2736,4128 2736,4033 2834,3935 v1(2834,3628) ; v1(3719,3682) 3719,3748 3878,3907 3878,3953 U44.40@3905,3980
  BottomLayer w10: v1(2834,3628) 2840,3622 3152,3622 3159,3629 3548,3629 3601,3682 v1(3719,3682)
$$$6991: U17.6 U29.63 | length 2046.8
  BottomLayer w10: U29.63@3305,5160 3346,5160 3352,5154 3352,4942 3318,4908 3265,4908 3259,4902 3259,4711 3261,4709 3492,4709 3554,4647 3554,4558 3561,4551 4556,4551 U17.6@4605,4600
$$$7007: U16.10 U19.12 U43.11 U47.12 | length 4725.3
  TopLayer w10: U43.11@2685,4860 2685,4696 2734,4647 2734,4551 2699,4516 v1(2699,4379)
  BottomLayer w10: v1(2699,4379) 2753,4325 ; U47.12@2785,4300 U47.12@2778,4300 ; U16.10@3605,4300 U16.10@3591,4286 ; U19.12@6625,4300 6515,4190 6146,4190 6136,4180 5258,4180 5229,4151 4946,4151 4910,4187 4551,4187 4536,4202 3675,4202 U16.10@3591,4286 ; 2753,4325 U47.12@2778,4300 ; 2753,4325 2753,4300 U47.12@2778,4300 ; U47.12@2778,4300 2781.5,4296.5 2853,4225 3530,4225 U16.10@3591,4286
$$$7022: U7.10 U14.5 U28.33 U57.11 | length 12197.8
  TopLayer w10: v1(2590,6866) 2535,6811 2535,6588 2434,6487 2434,5951 2407,5924 2407,5850 2434,5823 2434,3131 2534,3031 2534,2899 2562,2871 2604,2871 2634,2901 2634,2964 2595,3003 2595,3090 U57.11@2685,3180 ; v1(6275,6723) 6275,5938 6371,5842 6371,5786 6374,5783 6374,5427 6425,5376 U14.5@6425,5160
  BottomLayer w10: v1(2590,6866) 2616,6840 2972,6840 3005,6807 3324,6807 3352,6779 3352,6749 3387,6714 4059,6714 ; U28.33@4105,6760 4059,6714 ; U7.10@4705,5460 4953,5212 4953,5119 4961,5111 5144,5111 5293,5260 5595,5260 5651,5316 5752,5316 5765,5303 5765,5246 5800,5211 6374,5211 U14.5@6425,5160 ; v1(6275,6723) 6180,6818 4381,6818 4270,6707 4066,6707 4059,6714
$$$7226: U33.5 U44.46 | length 1632.9
  TopLayer w10: U44.46@3605,3980 3605,3942 3617,3930 v1(3617,3585)
  BottomLayer w10: v1(3617,3585) 3672,3530 4271,3530 4369,3432 4525,3432 4556,3463 4556,3499 4586,3529 4656,3529 U33.5@4705,3480
$$$7323: C2.9 U13.5 | length 5373.8
  TopLayer w10: C2.9@3595,2280 v1(3595,2549) ; U13.5@5565,5160 5565,5013 5516,4964 5516,4776 5616,4676 5616,4051 5642,4025 5672,4025 5819,3878 5819,3818 5816,3815 5816,3625 5914,3527 5914,2601 5884,2571 v1(5817,2571)
  BottomLayer w10: v1(3595,2549) 5718,2549 5740,2571 v1(5817,2571)
$$$7355: U17.2 U44.44 | length 1930.7
  TopLayer w10: v1(3665,4509) 3656,4500 3656,4029 U44.44@3705,3980
  BottomLayer w10: v1(3665,4509) 4758,4509 4797,4548 4953,4548 U17.2@5005,4600
$$$7715: U10.1 U60.3 | length 6849.2
  TopLayer w10: v1(2674,3984) 2735,3923 2735,3668 2833,3570 2833,2968 U60.3@2785,2920 ; v1(2934,4185) 2937,4188 2937,5543 2890,5590 2890,5690 2934,5734 2934,5921 3033,6020 3033,6100 3012,6121 2998,6121 2946,6173 2946,6254 2975,6283 3002,6283 3044,6325 3044,6510 2937,6617 v1(2937,7024)
  BottomLayer w10: v1(2674,3984) 2859,3984 2934,4059 v1(2934,4185) ; v1(2937,7024) 2944,7031 5065,7031 5105,6991 U10.1@5105,6960
$$$7778: U52.3 U52.8 U55.11 U58.8 | length 2513.6
  TopLayer w10: U58.8@665,2620 815,2770 815,3030 U55.11@965,3180 716,3429 716,3562 665,3613 U52.8@665,3780 665,3984 714,4033 714,4342 721,4349 804,4349 814,4339 814,4241 857,4198 947,4198 U52.3@1065,4080
$$$7877: U17.1 U29.7 | length 1686.4
  BottomLayer w10: U29.7@3605,4760 3664,4701 4059,4701 4151,4609 4235,4609 4327,4701 5079,4701 5105,4675 U17.1@5105,4600
$$$7942: U2.3 U4.5 U32.4 | length 1742.5
  BottomLayer w10: U2.3@4905,6360 4954,6311 5516,6311 U4.5@5565,6360 5637,6288 6491,6288 6498,6295 6498,6333 U32.4@6525,6360
$$$8047: U2.4 U4.1 | length 1200.6
  BottomLayer w10: U2.4@4805,6360 4854,6409 5916,6409 U4.1@5965,6360
$$$8066: U8.4 U19.11 | length 2330.1
  TopLayer w10: v1(6176,4253) 6176,5637 v1(6183,5644)
  BottomLayer w10: U8.4@5665,5760 5766,5659 6168,5659 v1(6183,5644) ; v1(6176,4253) 6178,4251 6476,4251 U19.11@6525,4300
$$$8332: U29.24 U44.53 | length 2465.4
  TopLayer w10: U29.24@4205,5160 4159,5114 4159,4920 4165,4914 4251,4914 4291,4874 v1(4291,4090)
  BottomLayer w10: U44.53@3305,3980 3355,3930 3425,3930 3457,3962 3457,4098 3485,4126 4044,4126 4058,4112 4058,4041 4066,4033 4234,4033 v1(4291,4090)
$$$8531: U28.18 U29.2 | length 2097.1
  TopLayer w10: U28.18@4205,6060 4275,5990 4275,5034 v1(4251,5010)
  BottomLayer w10: U29.2@3305,4860 3455,5010 v1(4251,5010)
$$$8623: U2.10 U28.46 | length 1927.1
  TopLayer w10: v1(4160,6907) 4277,6907 4453,6731 4626,6731 4656,6701 4656,6518 4754,6420 4754,6285 4705,6236 U2.10@4705,6060
  BottomLayer w10: U28.46@3605,6860 3652,6813 3824,6813 3858,6847 3858,6899 3866,6907 v1(4160,6907)
$$$8661: U3.11 U31.1 | length 1517.3
  BottomLayer w10: U3.11@5665,6660 5737,6588 6749,6588 6776,6615 6776,6911 U31.1@6825,6960
$$$8669: C4.15 U54.6 U59.12 | length 2781.8
  TopLayer w10: C4.15@2075,2300 2075,2535 v1(2100,2535) ; U54.6@2485,4080 2485,3899 2534,3850 2534,3691 2602,3623 2701,3623 2736,3588 2736,3133 2749,3120 2749,2997 2734,2982 2734,2669 v1(2733,2668)
  BottomLayer w10: U59.12@1925,2620 2010,2535 v1(2100,2535) 2368,2535 2434,2601 2434,2665 2437,2668 v1(2733,2668)
$$$8706: U52.11 U53.10 U56.2 | length 1657.4
  TopLayer w10: v1(965,3645) U52.11@965,3780
  BottomLayer w10: v1(965,3645) 966,3644 1215,3644 1228,3631 1289,3631 1323,3665 1576,3665 ; U53.10@1725,3780 1610,3665 1576,3665 ; U56.2@2025,3480 1977,3432 1588,3432 1576,3444 1576,3665
$$$8739: U7.13 U10.9 U16.12 | length 3913.3
  TopLayer w10: U10.9@4605,6660 4569,6624 4565,6624 4556,6615 4556,6001 4585,5972 4800,5972 4854,5918 4854,5323 ; v1(4756,4252) 4756,5249 4830,5323 4854,5323 ; U7.13@5005,5460 4868,5323 4854,5323
  BottomLayer w10: U16.12@3805,4300 3853,4252 v1(4756,4252)
$$$8914: U6.8 U29.10 | length 1920.2
  TopLayer w10: v1(4453,4910) 4453,3880 4505,3828 U6.8@4505,3780
  BottomLayer w10: U29.10@3705,4860 3755,4910 v1(4453,4910)
$$$9132: U29.65 U36.8 U44.2 U44.64 | length 3319.2
  TopLayer w10: U44.64@3205,3380 3252,3333 3337,3333 3352,3348 3352,4003 3325,4030 3262,4030 3257,4035 3257,4452 3211,4498 3211,4658 3250,4697 3325,4697 3352,4724 3352,5054 3346,5060 U29.65@3305,5060 ; U44.2@3305,3180 3256,3131 3256,2701 3288,2669 3356,2669 U36.8@3405,2620
  BottomLayer w10: U44.64@3205,3380 3150,3380 3082,3312 3082,3226 3120,3188 3147,3188 3186,3227 3258,3227 U44.2@3305,3180
$$$9320: U9.1 U13.1 U32.1 | length 2311.3
  TopLayer w10: v1(5917,5861) 5917,5208 U13.1@5965,5160 ; U9.1@6825,5760 6825,5920 6776,5969 6776,6110 6825,6159 U32.1@6825,6360
  BottomLayer w10: v1(5917,5861) 6724,5861 U9.1@6825,5760
$$$9321: U45.10 U55.13 U56.10 | length 2004.3
  TopLayer w10: U45.10@865,4300 865,4259 896,4228 1060,4228 1114,4174 1114,4056 1085,4027 1085,3847 1116,3816 1116,3376 1165,3327 U55.13@1165,3180
  BottomLayer w10: U55.13@1165,3180 1165,3144 1200,3109 1654,3109 U56.10@1725,3180
$$$9542: U11.3 U19.6 U37.10 | length 3795.7
  TopLayer w10: U37.10@4705,2620 4754,2571 4824,2571 4854,2601 4854,2649 4654,2849 4654,3952 4671,3969 v1(4883,3969) ; U11.3@5765,4080 5816,4131 5816,4504 5852,4540 v1(5913,4540)
  BottomLayer w10: v1(4883,3969) 4920,4006 5729,4006 5738,4015 5738,4053 U11.3@5765,4080 ; v1(5913,4540) 6265,4540 U19.6@6325,4600
$$$9687: U21.10 U28.62 U29.46 U50.12 | length 5891.3
  TopLayer w10: v1(3110,5027) 3144,5061 v1(3144,5122) ; U28.62@3205,6360 3258,6307 3390,6307 3482,6215 3482,6164 3424,6106 3364,6106 3358,6100 3358,5891 3452,5797 3452,5628 v1(3475,5605) 3492,5588 v1(3492,5383) ; v1(3366,5214) v1(3366,5383)
  BottomLayer w10: U21.10@865,6060 914,6109 1009,6109 1016,6102 1016,6016 1050,5982 1602,5982 1749,5835 2269,5835 2291,5813 2520,5813 2534,5799 2534,5687 2626,5595 2939,5595 3060,5474 3060,5077 v1(3110,5027) ; U50.12@2785,6660 2785,6616 2813,6588 2856,6588 2860,6584 2860,6421 2868,6413 3152,6413 U28.62@3205,6360 ; v1(3144,5122) 3144,5183 3175,5214 v1(3366,5214) ; v1(3366,5383) v1(3492,5383) ; v1(3475,5605) 3550,5605 U29.46@3605,5660
$$$9865: U18.8 U44.50 | length 3736.8
  TopLayer w10: v1(3372,4355) 3356,4339 3356,4064 3405,4015 U44.50@3405,3980
  BottomLayer w10: v1(3372,4355) 3379,4348 3625,4348 3655,4318 3655,4257 3684,4228 4706,4228 4721,4213 4936,4213 4975,4174 5076,4174 5106,4204 5358,4204 5360,4206 5850,4206 5914,4270 5914,4339 5904,4349 5414,4349 U18.8@5365,4300
$$$9883: U28.12 U28.50 | length 1655.3
  TopLayer w10: U28.50@3405,6860 3358,6907 3283,6907 3252,6876 3252,6839 3220,6807 3166,6807 3158,6799 3158,6218 3169,6207 3385,6207 v1(3422,6170)
  BottomLayer w10: v1(3422,6170) 3457,6205 3551,6205 3601,6155 3710,6155 U28.12@3805,6060
$$$AADHE: U46.1 U54.2 U58.2 | length 5427.3
  TopLayer w10: v1(717,3320) 717,3111 617,3011 617,2600 645,2572 889,2572 917,2600 917,2660 926,2669 1000,2669 1165,2834 U58.2@1165,2920 ; v1(816,3887) 816,3665 874,3607 v1(874,3550) ; v1(1874,4019) v1(1874,4468)
  BottomLayer w10: v1(717,3320) 717,3555 739,3577 847,3577 v1(874,3550) ; v1(816,3887) 842,3913 962,3913 1008,3867 1376,3867 1487,3978 1833,3978 v1(1874,4019) 1886,4031 2069,4031 2076,4038 2076,4119 2085,4128 2165,4128 2173,4120 2173,4096 2237,4032 2837,4032 U54.2@2885,4080 ; v1(1874,4468) 1946,4540 2100,4540 2125,4565 U46.1@2125,4600
$$$AGECH: U33.2 U35.2 | length 1803.7
  BottomLayer w10: U33.2@5005,3480 5106,3379 6624,3379 U35.2@6725,3480
$$$AHHHI: U23.2 U40.11 U51.8 | length 1847.7
  BottomLayer w10: U40.11@965,6660 1119,6506 1517,6506 1526,6497 1943,6497 2025,6415 U23.2@2025,6360 ; 2025,6413 2050,6438 2185,6438 2223,6400 2223,6336 2358,6201 2358,6087 U51.8@2385,6060
$$$AHJFD: U21.12 U22.13 U28.8 U42.6 | length 5211.4
  TopLayer w10: U21.12@1065,6060 v1(1065,6251) ; v1(1735,5223) 1735,5362 1676,5421 1676,5794 v1(1768,5886) ; U22.13@2025,6660 2074,6611 2074,6252 v1(2073,6251)
  BottomLayer w10: U21.12@1065,6060 1114,6011 1643,6011 v1(1768,5886) ; v1(1065,6251) v1(2073,6251) ; U42.6@1625,5160 1688,5223 v1(1735,5223) ; U22.13@2025,6660 2074,6611 2479,6611 2502,6588 2553,6588 2734,6407 2734,6324 2770,6288 2976,6288 3151,6113 3217,6113 3258,6072 3258,6021 3266,6013 3523,6013 3570,6060 U28.8@3605,6060
$$$AIHDE: U29.49 U41.3 U46.2 | length 4323.3
  TopLayer w10: U41.3@1065,5160 1065,4956 1114,4907 v1(1114,4549) ; v1(3031,4910) 3034,4913 3034,5632 3042,5640 3087,5640 3153,5706 3351,5706 U29.49@3405,5760
  BottomLayer w10: v1(1114,4549) 1164,4499 1813,4499 1874,4560 1874,4622 1901,4649 2074,4649 ; U46.2@2025,4600 2074,4649 ; v1(3031,4910) 3034,4907 3034,4561 3025,4552 2754,4552 2736,4570 2736,4642 2729,4649 2074,4649
$$$AJGAA: U11.1 U35.1 | length 1667.4
  TopLayer w10: U35.1@6825,3480 6873,3528 v1(6873,4017)
  BottomLayer w10: U11.1@5965,4080 6013,4032 6465,4032 6474,4041 6474,4102 6501,4129 6864,4129 6873,4120 v1(6873,4017)
$$$AJIBG: U33.10 U36.1 | length 909.8
  BottomLayer w10: U36.1@4005,2920 4053,2968 4426,2968 4554,3096 4554,3201 4582,3229 4656,3229 U33.10@4705,3180